# Altium PCB temperature_logger_pcb_v2.PcbDoc
Units mm, origin at the board's own origin, x right, y up, seen from the top; angles counter-clockwise.
Board outline 26.5 x 36 mm, 2 copper layers (Top Layer, Bottom Layer); 41 components, 32 nets, 188 pads, 42 vias.
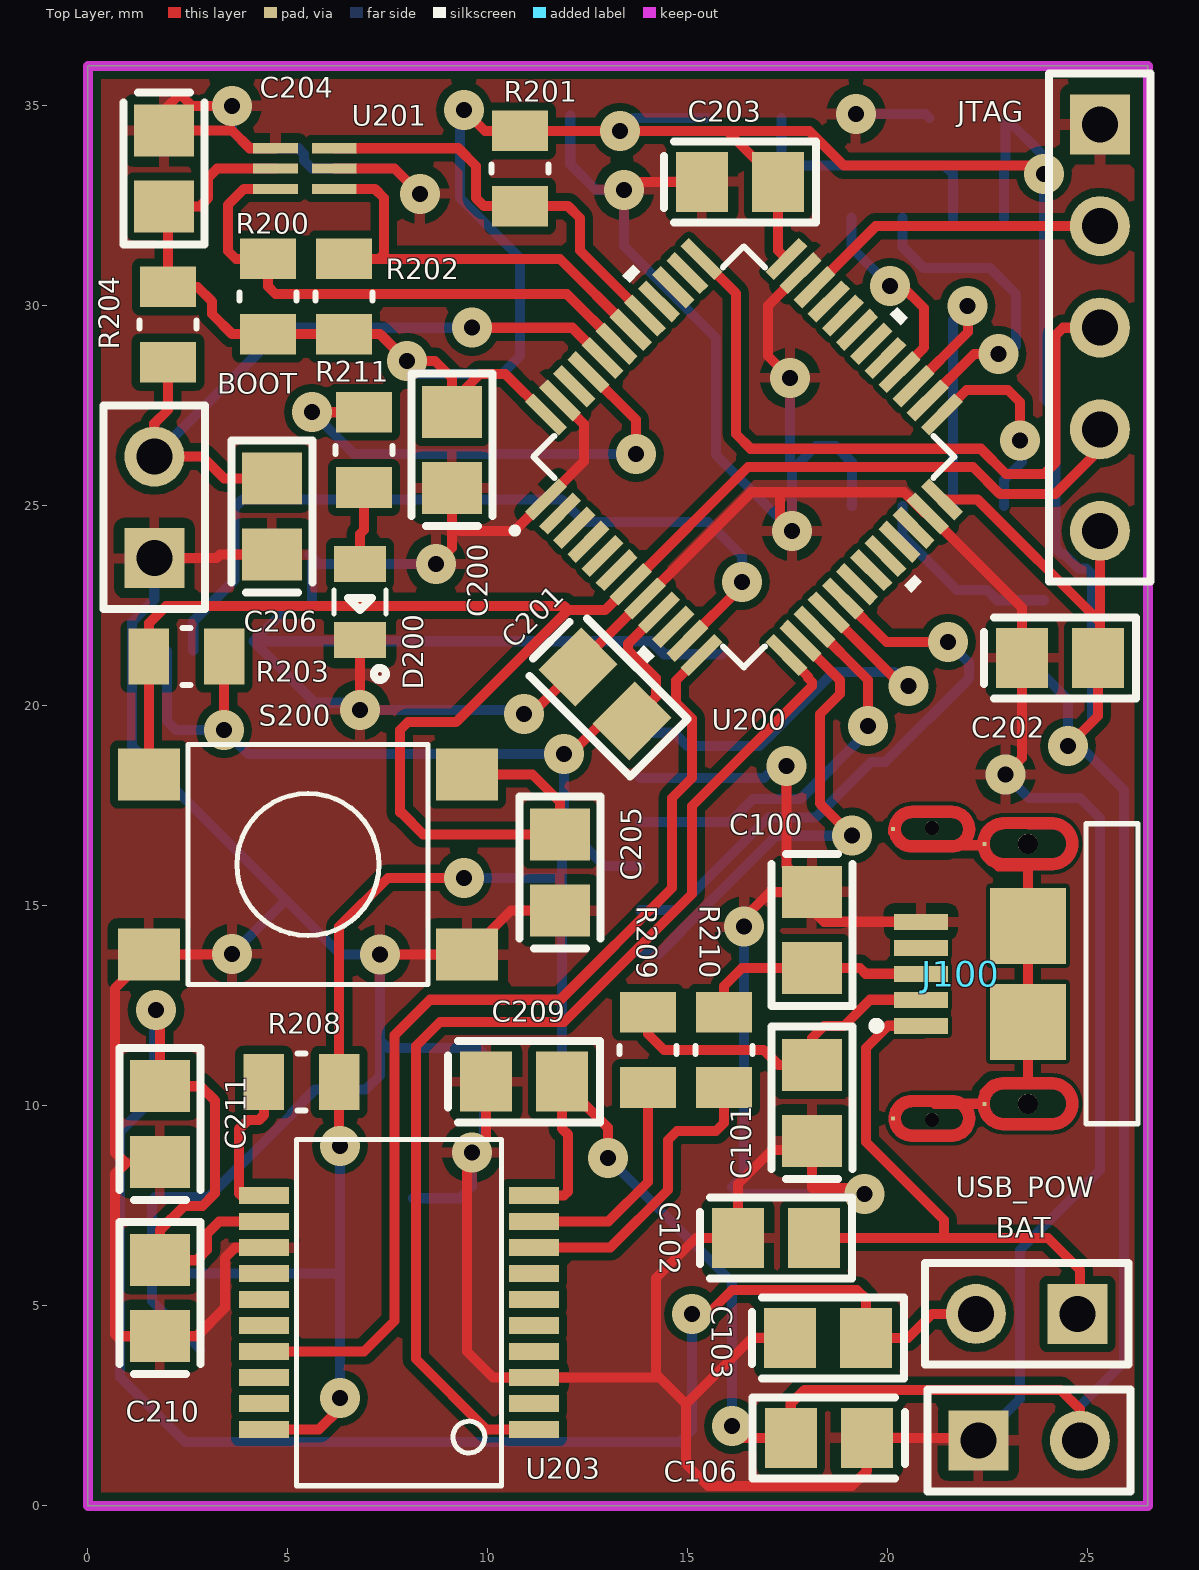
[diagram p0: Top Layer view]
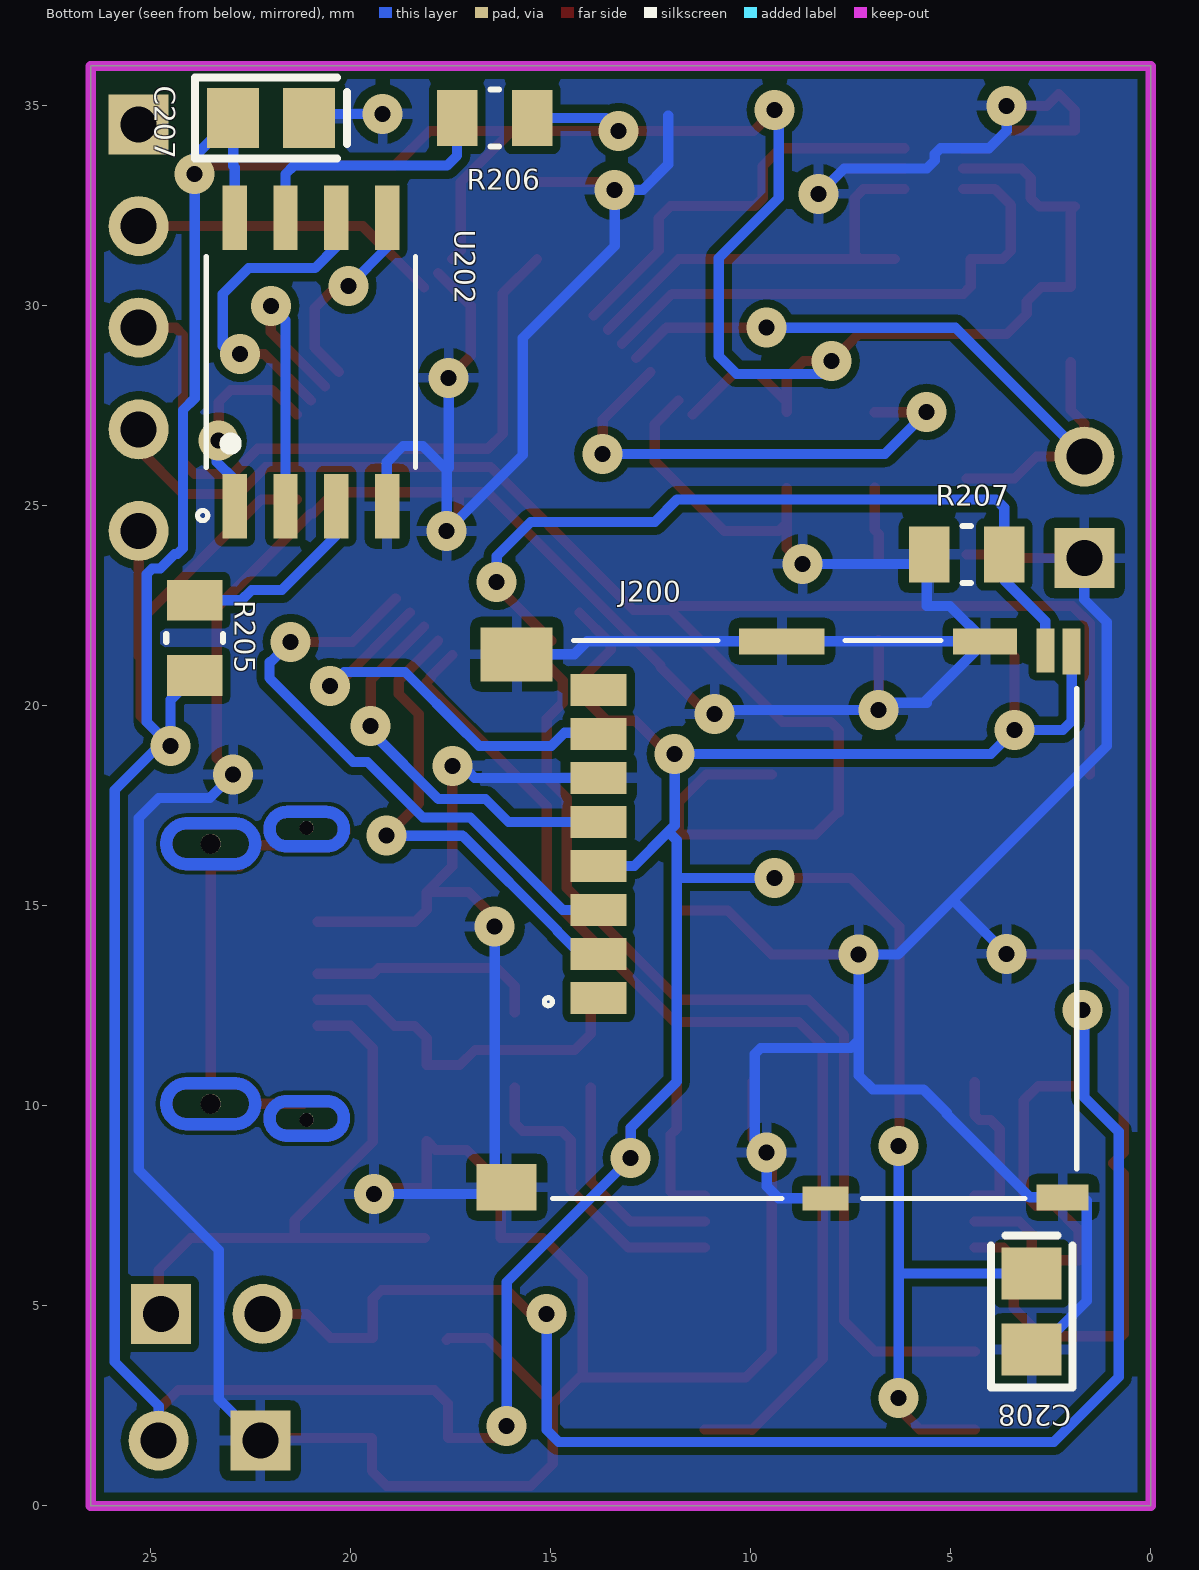
[diagram p1: Bottom Layer view, seen from below]

## Layer stack, top to bottom
Top Solder: solder mask 0.0102, Solder Resist, Dk 3.5
Top Layer: signal copper 0.0356
Dielectric 1: dielectric 0.32, FR-4, Dk 4.8
Bottom Layer: signal copper 0.0356
Bottom Solder: solder mask 0.0102, Solder Resist, Dk 3.5

## Board outline
0,0 0,36 26.5,36 26.5,0

## Design rules (kind name [scope] priority, off if disabled: settings)
Clearance STM32F4 [InComponent('U200')] p1: gap=0.152 ignorepadtopadclearanceinfootprint=FALSE
Clearance USB_PORT [InComponent('J100')] p2: gap=0.102 ignorepadtopadclearanceinfootprint=FALSE
Clearance [All] p3: gap=0.203 ignorepadtopadclearanceinfootprint=FALSE
PolygonConnect [All] p1: connectstyle=Relief reliefconductorwidth=0.254 reliefentries=4 polygonreliefangle="90 Angle" airgapwidth=0.254
RoutingVias [All] p1: holewidth=0.4 width=1 viastyle="Through Hole" minholewidth=0.3 minwidth=1 maxholewidth=0.711 maxwidth=1
SolderMaskExpansion [All] p1: expansion=0.102
Width [All] p1: maxlimit=0.381 minlimit=0.152 preferedwidth=0.254
30 further rules are at their usual default settings.

## Classes and differential pairs
component class 01_Power: BAT C100 C101 C102 C103 C106 J100 USB_POW
component class 02_MCU: BOOT C200 C201 C202 C203 C204 C205 C206 C207 C208 C209 C210 C211 D200 J200 JTAG R200 R201 R202 R203 R204 R205 R206 R207 R208 R209 R210 R211 S200 U200 U201 U202 U203

## Components (designator, comment, footprint, x,y, rotation, side; value= is the part's Value field where it differs from the comment)
BAT "" HDR1X2 22.26,1.635 r0 top
BOOT "" HDR1X2 1.66,23.695 r90 top
C100 "47 pF" C0805 18.1,14.4 r270 top
C101 "47 pF" C0805 18.1,10.077 r90 top
C102 "10 nF" C0805 17.2,6.7 r0 top
C103 "100 nF" C0805 18.5,4.2 r0 top
C106 "10 nF" C0805 18.521,1.7 r180 top
C200 "1000 pF" C0805 9.1,26.4 r90 top
C201 "1000 pF" C0805 12.929,20.3 r315 top
C202 "1000 pF" C0805 24.3,21.2 r0 top
C203 "1000 pF" C0805 16.3,33.1 r0 top
C204 "1000 pF" C0805 1.9,33.435 r270 top
C205 "1000 pF" C0805 11.8,15.835 r90 top
C206 "1000 pF" C0805 4.6,24.735 r90 top
C207 "1000 pF" C0805 21.988,34.7 r0 bottom
C208 "1000 pF" C0805 2.975,4.86 r270 bottom
C209 "100 nF" C0805 10.9,10.607 r0 top
C210 "1000 pF" C0805 1.8,5.193 r90 top
C211 "47 pF" C0805 1.8,9.543 r90 top
D200 "LGR971" D0805 6.8,22.6 r270 top value="Green LED"
J100 "USB_Micro_B" MicroUSB 23.5,13.304 r90 top value="USB Micro B"
J200 "MicroSD" MicroSD 9.05,14.665 r270 bottom
JTAG "" HDR1X5 25.3,34.535 r270 top
R200 "5 k" R0805 4.5,30.235 r90 top value=5k
R201 "5 k" R0805 10.8,33.435 r270 top value=5k
R202 "5 k" R0805 6.4,30.235 r90 top value=5k
R203 "1 k" R0805 2.465,21.235 r180 top value=1k
R204 "1 k" R0805 2,29.535 r270 top value=1k
R205 "1 k" R0805 23.9,21.7 r90 bottom value=1k
R206 "1 k" R0805 16.4,34.7 r0 bottom value=1k
R207 "10 k" R0805 4.6,23.785 r0 bottom value=10k
R208 "1 k" R0805 5.34,10.6 r180 top value=1k
R209 "27" R0805 14,11.4 r90 top
R210 "27" R0805 15.9,11.4 r90 top
R211 "1 k" R0805 6.9,26.4 r90 top value=1k
S200 "Switch_tactile" Tactile1 5.5,16.035 r180 top value=Switch_Tactile
U200 "STM32L053" LQFP48-7x7mm 16.4,26.224 r45 top locked value=STM32L053C8T6
U201 "TMP112" SOT563 5.425,33.435 r180 top value=TMP112AIDRLT
U202 "16MB_FLASH" 8-SOIC 20.996,28.6 r90 bottom value=MX25R1635FM2IH1
U203 "FT231XS-R" SSOP20 7.775,4.835 r90 top
USB_POW "" HDR1X2 24.74,4.8 r180 top

## Footprints (in the part's own frame and the unit in brackets; to place one, negate y for a bottom-side part, rotate by r counter-clockwise, add the part's x,y. Pads: shape width x height; smd on the part's side, far side on the other; paste and mask are expansions set on the pad)
8-SOIC [mm]
  rect 1.61x0.61 smd: 1(-3.605,1.905) 2(-3.605,0.635) 3(-3.605,-0.635) 4(-3.605,-1.905) 5(3.605,-1.905) 6(3.605,-0.635) 7(3.605,0.635) 8(3.605,1.905)
  silkscreen extent -3.97,-2.62 2.64,2.83
C0805 [mm] "Chip Capacitor; Body 2.0 x 1.2 mm (LxW typ)"
  rect 1.3x1.5 smd: 1(-0.95,0) 2(0.95,0)
  silkscreen extent -1.9,-1.02 1.91,1.02
D0805 [mm]
  rect 0.9x1.3 smd: A(-0.95,0) C(0.95,0)
  silkscreen extent -0.3,-0.65 1.95,0.65
HDR1X2 [mm] "Connector; Header; 2 Position"
  rect 1.5x1.5 hole 0.9: 1(0,0)
  round 1.5 hole 0.9: 2(2.54,0)
  silkscreen extent -1.27,-1.27 3.81,1.27
HDR1X5 [mm] "Connector; Header; 5 Position"
  rect 1.5x1.5 hole 0.9: 1(0,0)
  round 1.5 hole 0.9: 2(2.54,0) 3(5.08,0) 4(7.62,0) 5(10.16,0)
  silkscreen extent -1.27,-1.27 11.43,1.27
LQFP48-7x7mm [mm]
  rect 1.194x0.305 smd: 1(-4.25,2.75) 2(-4.25,2.25) 3(-4.25,1.75) 4(-4.25,1.25) 5(-4.25,0.75) 6(-4.25,0.25) 7(-4.25,-0.25) 8(-4.25,-0.75) 9(-4.25,-1.25) 10(-4.25,-1.75) 11(-4.25,-2.25) 12(-4.25,-2.75) 25(4.25,-2.75) 26(4.25,-2.25) 27(4.25,-1.75) 28(4.25,-1.25) 29(4.25,-0.75) 30(4.25,-0.25) 31(4.25,0.25) 32(4.25,0.75) 33(4.25,1.25) 34(4.25,1.75) 35(4.25,2.25) 36(4.25,2.75)
  rect 0.305x1.194 smd: 13(-2.75,-4.25) 14(-2.25,-4.25) 15(-1.75,-4.25) 16(-1.25,-4.25) 17(-0.75,-4.25) 18(-0.25,-4.25) 19(0.25,-4.25) 20(0.75,-4.25) 21(1.25,-4.25) 22(1.75,-4.25) 23(2.25,-4.25) 24(2.75,-4.25) 37(2.75,4.25) 38(2.25,4.25) 39(1.75,4.25) 40(1.25,4.25) 41(0.75,4.25) 42(0.25,4.25) 43(-0.25,4.25) 44(-0.75,4.25) 45(-1.25,4.25) 46(-1.75,4.25) 47(-2.25,4.25) 48(-2.75,4.25)
  silkscreen extent -5.43,-5.35 5.35,5.35, body extent 0,0 0.25,0.25, height 0.25
MicroSD [mm]
  rect 0.8x1.4 smd: 1(1.965,-4.75) 2(0.865,-4.75) 3(-0.235,-4.75) 4(-1.335,-4.75) 5(-2.435,-4.75) 6(-3.535,-4.75) 7(-4.635,-4.75) 8(-5.735,-4.75)
  rect 1.15x0.45 smd: 9(-6.7,7.075)
  rect 1.1x0.45 smd: 10(-6.725,6.415)
  rect 1.35x1.8 smd: 11(-6.625,-6.8)
  rect 0.65x2.14 smd: 12(-6.95,-0.17)
  rect 0.65x1.6 smd: 13(-6.95,4.91)
  rect 0.65x1.3 smd: 14(6.95,6.85)
  rect 0.6x1.15 smd: 15(6.975,0.925)
  rect 1.16x1.5 smd: 16(6.695,-7.05)
  silkscreen extent -6.98,-6.11 6.98,7.2
MicroUSB [mm]
  rect 0.4x1.35 smd: 1(-1.3,2.675) 2(-0.65,2.675) 3(0,2.675) 4(0.65,2.675) 5(1.3,2.675)
  round 0.35 hole 0.35 unplated: None(-3.65,2.4) None(3.65,2.4)
  round 0.5 hole 0.5 unplated: None(-3.25,0) None(3.25,0)
  rect 0.1x0.1 smd: S1(-3.25,1.08) S2(3.25,1.08) S3(-3.615,3.369) S6(3.615,3.369)
  rect 1.9x1.9 smd: S4(-1.2,0) S5(1.2,0)
  Top Layer region: 258 vertices and 0 holes, not listed, extent -3.91,-1.26 -2.59,1.26
  Top Layer region: 258 vertices and 0 holes, not listed, extent 2.59,-1.26 3.91,1.26
  Top Layer region: 258 vertices and 0 holes, not listed, extent -4.195,1.32 -3.035,3.48
  Top Layer region: 258 vertices and 0 holes, not listed, extent 3.035,1.32 4.195,3.48
  Bottom Layer region: 258 vertices and 0 holes, not listed, extent -3.91,-1.26 -2.59,1.26
  Bottom Layer region: 258 vertices and 0 holes, not listed, extent 2.59,-1.26 3.91,1.26
  Bottom Layer region: 258 vertices and 0 holes, not listed, extent -4.195,1.32 -3.035,3.48
  Bottom Layer region: 258 vertices and 0 holes, not listed, extent 3.035,1.32 4.195,3.48
  silkscreen extent -3.75,-2.75 3.75,3.89
R0805 [mil]
  rect 40x55 smd: 1(-37,0) 2(37,0)
  silkscreen extent -4,-28 4,28
SOT563 [mil]
  rect 44x10 smd: 1(-29,20) 2(-29,0) 3(-29,-20) 4(29,-20) 5(29,0) 6(29,20)
SSOP20 [mm]
  rect 0.42x1.25 smd: P$1(-2.925,-3.375) P$2(-2.275,-3.375) P$3(-1.625,-3.375) P$4(-0.975,-3.375) P$5(-0.325,-3.375) P$6(0.325,-3.375) P$7(0.975,-3.375) P$8(1.625,-3.375) P$9(2.275,-3.375) P$10(2.925,-3.375) P$11(2.925,3.375) P$12(2.275,3.375) P$13(1.625,3.375) P$14(0.975,3.375) P$15(0.325,3.375) P$16(-0.325,3.375) P$17(-0.975,3.375) P$18(-1.625,3.375) P$19(-2.275,3.375) P$20(-2.925,3.375)
  silkscreen extent -4.33,-2.56 4.33,2.56
Tactile1 [mm] "6 mm x 6 mm"
  rect 1.55x1.3 smd: 1(-3.975,2.25) 2(3.975,2.25) 3(-3.975,-2.25) 4(3.975,-2.25)
  silkscreen extent -3,-3 3,3

## Part data
BAT BOOT USB_POW: library part "Header 2", "Header, 2-Pin", LatestRevisionDate=17-Jul-2002, LatestRevisionNote="Re-released for DXP Platform.", Publisher="Altium Limited"
C100 C101 C211: library part Cap-47pF, "CAP CER 47PF 1KV C0G/NP0 0805", Manufacturer=KEMET, Manufacturer Part Number=C0805C470JDGACTU, Package=C0805, Digikey_link=https://www.digikey.com.au/product-detail/en/kemet/C0805C470JDGACTU/399-7157-1-ND/3439404, Price="0.62 AUD"
C102 C106: library part Cap-10nF, "CAP CER 10000PF 10V X7R 0805", Manufacturer="Wurth Electronics Inc.", Manufacturer Part Number=885012207011, Package=C0805, Digikey_link=https://www.digikey.com.au/product-detail/en/wurth-electronics-inc/885012207011/732-8021-1-ND/5454648, Price="0.15 AUD"
C103 C209: library part Cap-100nF, "CAP CER 0.1UF 50V X7R 0805", Manufacturer=KEMET, Manufacturer Part Number=C0805X104K5RACTU, Package=C0805, Digikey_link=https://www.digikey.com.au/product-detail/en/kemet/C0805X104K5RACTU/399-5330-1-ND/1842309, Price="0.46 AUD"
C200 C201 C202 C203 C204 C205 C206 C207 C208 C210: library part Cap-1000pF, "CAP CER 1000PF 100V X7R 0805", Manufacturer=KEMET, Manufacturer Part Number=C0805C102K1RACTU, Package=C0805, Digikey_link=https://www.digikey.com.au/product-detail/en/kemet/C0805C102K1RACTU/399-1148-2-ND/411147, Price="0.035 USD"
D200: "LED GREEN DIFFUSED 0805 SMD", Manufacturer="Osram Opto", Manufacturer Part Number="LG R971-KN-1", Package=LED0805, Digikey_link=https://www.digikey.com.au/product-detail/en/osram-opto-semiconductors-inc/LG-R971-KN-1/475-1410-2-ND/1227925, Price="0.09 USD"
J100: "USB - micro B USB 2.0 Receptacle Connector 5 Position Surface Mount, Right Angle; Through Hole", Manufacturer="TE Connectivity", Manufacturer Part Number=2040002-1, Package=USB-Micro-B, Digikey_link=https://www.digikey.com.au/product-detail/en/te-connectivity-amp-connectors/2040002-1/A108263CT-ND/4021990, Price="3.03 USD", Product_Type=Connector
J200: "MICRO SD PUSH PUSH LOW PROFILE TYPE", Manufacturer="TE Connectivity", Manufacturer Part Number=2201778-1, Digikey_link=https://www.digikey.com.au/product-detail/en/te-connectivity-amp-connectors/2201778-1/A118117CT-ND/4729820, Package=MicroSD, Price="3.61 USD", Product_Type="Removable Memory Products"
JTAG: library part "Header 5", "Header, 5-Pin", LatestRevisionDate=17-Jul-2002, LatestRevisionNote="Re-released for DXP Platform.", Publisher="Altium Limited"
R200 R201 R202: library part Res-5k, "RES SMD 4.7K OHM 0.1% 1/8W 0805", Manufacturer="Panasonic Electronic Components", Manufacturer Part Number=ERA-6AEB472V, Package=R0805, Digikey_link=https://www.digikey.com.au/product-detail/en/panasonic-electronic-components/ERA-6AEB472V/P4.7KDACT-ND/1465963, Price="0.51 AUD"
R203 R204 R205 R206 R208 R211: library part Res-1k, "RES 1K OHM 0.1% 1/5W 0805", Manufacturer="Vishay Dale", Manufacturer Part Number=TNPW08051K00BEEA, Package=R0805, Digikey_link=https://www.digikey.com.au/product-detail/en/vishay-dale/TNPW08051K00BEEA/TNP1.00KABTR-ND/1607282, Price="0.03 USD"
R207: library part Res-10k, "RES SMD 10K OHM 0.1% 1/8W 0805", Manufacturer="Panasonic Electronic Components", Manufacturer Part Number=ERA-6AEB103V, Package=R0805, Digikey_link=https://www.digikey.com/product-detail/en/panasonic-electronic-components/ERA-6AEB103V/P10KDACT-ND/1465971, Price="0.36 AUD"
R209 R210: library part Res-27, "RES SMD 27 OHM 5% 1/8W 0805", Manufacturer="Panasonic Electronic Components", Manufacturer Part Number=ERJ-6GEYJ270V, Package=R0805, Digikey_link=https://www.digikey.com.au/product-detail/en/panasonic-electronic-components/ERJ-6GEYJ270V/P27ACT-ND/42810, Price="0.11 AUD"
S200: "SWITCH TACTILE SPST-NO 0.05A 12V", Manufacturer="C&K Components", Manufacturer Part Number=PTS645SM43SMTR, Package=6x6, Digikey_link=https://www.digikey.com.au/product-detail/en/c-k/PTS645SM43SMTR92-LFS/CKN9112CT-ND/1146934, Price="0.22 USD"
U200: library part STM32L0x3CL4, "IC MCU 32BIT 64KB FLASH 48LQFP", Manufacturer=STMicroelectronics, Manufacturer Part Number=STM32L053C8T6, Package=48LQFP, Digikey_link=https://www.digikey.com.au/product-detail/en/stmicroelectronics/STM32L053C8T6/497-14906-ND/4935255, Price="5.66 AUD"
U201: library part TMP112AIDRLT, "1.4V-Capable ?0.5?C Temperature Sensor with Alert Function and I2C/SMBus interface in SOT-563 6-SOT -40 to 125", Manufacturer="Texas Instruments", Package=SOT-563, Digikey_link=https://www.digikey.com/product-detail/en/texas-instruments/TMP112AIDRLR/296-38578-2-ND/2232593, Manufacturer Part Number=TMP112AIDRLT, Price="1 USD"
U202: library part MX25R1635, "IC FLASH 16M SPI 80MHZ 8SOP", Manufacturer=Macronix, Manufacturer Part Number=MX25R1635FM2IL0, Package=SOP-8, Digikey_link=https://www.digikey.com/product-detail/en/macronix/MX25R1635FM2IH1/1092-1176-ND/5957737, Price="0.97 USD"
U203: "USB Full Speed to Full Handshake UART with USB Charger Detection", Package="SSOP-20 FTDI", Availability=Good, MF=FTDI,, MP=FT231XS-R, Price="1.80 USD", SnapEDA_Link=https://www.snapeda.com/parts/FT231XS-R/FTDI%2C%20Future%20Technology%20Devices%20International%20Ltd/view-part/?ref=snap

## Via types
v1: diameter 1, hole 0.4, Top Layer to Bottom Layer, 42 vias

## Nets (pads, with @x,y where several pads share a name; then routed paths per layer and width w, separated by ;. In a path a pad name is that pad's centre, name@x,y a point inside that pad or via, vN(x,y) a via of type N, cw(c..) or ccw(c..) an arc to the next point about the centre after c; other vN are vias at no path point)
3V: BAT.2 C106.2 C200.2 C201.2 C202.2 C203.2 C204.2 C207.2 C208.1 C209.2 J200.4 J200.9 JTAG.5 R200.1 R201.1 R202.1 R203.1 R204.1 R205.1 R206.1 R208.1 U200.9 U200.24 U200.36 U200.48 U201.5 U202.8 U203.P$10 U203.P$20 | length 181.1
  Top Layer w0.254: v1(3.4,19.4) 3.405,19.405 R203.1 ; U203.P$20 5.774,1.91 6.279,2.415 6.279,2.679 v1(6.3,2.7) ; U201.5 3.235,33.435 3,33.2 3,32.695 2.79,32.485 C204.2 2,32.385 R204.1 2.738,30.475 3.1,30.113 3.1,29.8 3.605,29.295 R200.1 R202.1 7.304,29.295 v1(7.975,28.625) 8.675,28.625 9.1,28.2 C200.2@9.1,27.6 ; v1(6.3,9) 6.279,9.021 R208.1 6.279,14.479 7.5,15.7 v1(9.4,15.7) ; C200.2 C200.2@9.1,27.6 ; v1(9.4,34.9) 9.925,34.375 R201.1 v1(13.3,34.375) 15.975,34.375 ; U203.P$10 11.9,7.76 12.005,7.865 12.005,9.278 11.85,9.433 C209.2 13,9.457 v1(13,8.7) ; U200.48 10.435,28.3 9.8,28.3 C200.2@9.1,27.6 ; v1(11.9,18.8) 12.06,18.8 12.888,19.628 C201.2 14.2,20.227 14.2,20.7 13.5,21.4 13.5,21.556 U200.9 ; v1(16.1,2) 16.4,1.7 C106.2 17.571,2.559 17.912,2.9 24.315,2.9 24.8,2.415 BAT.2 ; U200.36 17.25,31.384 C203.2 15.975,34.375 ; U200.24 22.237,25.163 25.3,22.1 ; v1(23.9,33.3) 23.8,33.3 23.593,33.507 18.9,33.507 18.032,34.375 15.975,34.375 ; v1(24.502,19) 25.25,19.748 C202.2 25.3,21.25 25.3,22.1 ; JTAG.5 25.3,22.1
  Bottom Layer w0.254: J200.9 1.975,19.625 2.2,19.4 v1(3.4,19.4) 4,18.8 v1(11.9,18.8) 11.9,17.013 12.06,16.853 ; C208.1@2.425,5.81 C208.1 6.29,5.81 6.3,5.8 ; v1(6.3,2.7) 6.3,5.8 ; v1(6.3,9) 6.3,5.8 ; v1@7.975,28.3 10.35,28.3 10.8,28.75 10.8,31.2 9.3,32.7 9.3,34.8 9.34,34.76 9.4,34.82 v1(9.4,34.9) ; v1(9.4,15.7) 11.85,15.7 ; v1(13.3,34.375) 13.625,34.7 R206.1 ; J200.4 12.913,16 12.06,16.853 ; v1(16.1,2) 16.1,5.6 v1(13,8.7) 13,9.457 11.85,10.607 11.85,15.7 ; U202.8 22.901,33.463 22.938,33.5 C207.2 23.9,33.738 v1(23.9,33.3) 23.9,27.693 24.193,27.4 24.193,23.941 24.334,23.8 24.4,23.8 24.763,23.437 24.963,23.437 25.1,23.3 25.1,19.598 v1(24.502,19) ; R205.1 24.502,20.158 v1(24.502,19) ; BAT.2 24.8,2.5 25.9,3.6 25.9,17.9 24.9,18.9 24.602,18.9 v1(24.502,19) ; 11.85,15.7 11.85,16.643 12.06,16.853
5V: C103.2 C210.2 C211.2 U203.P$12 USB_POW.2 | length 47.8
  Top Layer w0.254: v1(1.7,12.4) 1.8,12.3 C211.2 2.806,10.493 2.813,10.5 3.175,10.138 3.175,7.81 2.865,7.5 2.405,7.5 1.8,6.895 C210.2 2.718,6.143 2.975,6.4 2.975,6.8 3.285,7.11 U203.P$12 ; v1(15.1,4.8) 15.5,4.8 16.1,5.4 19.228,5.4 19.45,5.178 C103.2 20.5,4.2 21.1,4.8 USB_POW.2
  Bottom Layer w0.254: v1(1.7,12.4) 1.66,12.36 1.66,10.217 0.8,9.357 0.8,3.225 2.425,1.6 14.8,1.6 15.1,1.9 v1(15.1,4.8)
ALERT: R201.2 U200.41 U201.3 | length 10.4
  Top Layer w0.254: U201.3 9.257,33.943 9.7,33.5 9.7,32.695 9.9,32.495 R201.2 12.005,32.495 12.3,32.2 12.3,31.385 U200.41
BOOT0: BOOT.2 C206.2 R204.2 U200.44 | length 18.5
  Top Layer w0.254: R204.2 2,27.4 1.66,27.06 BOOT.2 2.855,26.235 3.405,25.685 C206.2 ; v1(9.6,29.455) 12.108,29.455 U200.44
  Bottom Layer w0.254: BOOT.2 4.88,29.455 v1(9.6,29.455)
CARD_DETECT: J200.10 R207.1 U200.11 | length 20
  Top Layer w0.254: U200.11 16.35,22.992 v1(16.35,23.1)
  Bottom Layer w0.254: J200.10 2.635,22.119 3.66,23.144 R207.1 3.66,24.954 3.869,25.163 11.837,25.163 12.4,24.6 15.5,24.6 16.35,23.75 v1(16.35,23.1)
FLASH_CSN: U200.25 U202.1 | length 5.2
  Top Layer w0.254: U200.25 21.965,27.9 23,27.9 23.3,27.6 v1(23.3,26.635)
  Bottom Layer w0.254: U202.1 22.901,25.651 23.35,26.1 23.35,26.585 v1(23.3,26.635) v1@23.35,26.635
FLASH_MISO: U200.27 U202.2 | length 7.8
  Top Layer w0.254: U200.27 22,29.349 22,29.988 v1(21.988,30)
  Bottom Layer w0.254: U202.2 21.631,29.643 v1(21.988,30) v1@22.01,29.978
FLASH_MOSI: U200.28 U202.5 | length 5
  Top Layer w0.254: v1(20.053,30.5) 20.349,30.5 20.9,29.949 20.9,28.956 U200.28
  Bottom Layer w0.254: U202.5 19.091,31.462 v1(20.053,30.5)
FLASH_SCLK: U200.26 U202.6 | length 8.1
  Top Layer w0.254: U200.26 22.158,28.8 v1(22.763,28.8)
  Bottom Layer w0.254: U202.6 20.361,31.477 20.894,30.944 22.556,30.944 23.2,30.3 23.2,29 23,28.8 v1(22.763,28.8)
FT_RX: U200.13 U203.P$1 | length 27.5
  Top Layer w0.254: U203.P$1 9.985,1.91 9.975,1.9 8.2,3.675 8.2,11.5 8.8,12.1 11.9,12.1 15.1,15.3 15.1,17.5 18.1,20.5 18.1,20.6 18,20.7 18,20.735 U200.13
FT_TX: U200.12 U203.P$17 | length 25.6
  Top Layer w0.254: U203.P$17 6.9,3.86 7.665,4.625 7.665,11.765 8.554,12.654 11.807,12.654 14.6,15.447 14.6,17.7 15.1,18.2 15.1,19.68 14.7,20.08 14.7,20.635 U200.12
GND: BAT.1 BOOT.1 C100.1 C101.1 C102.1 C103.1 C106.1 C200.1 C201.1 C202.1 C203.1 C204.1 C205.1 C206.1 C207.1 C208.2 C209.1 C210.1 C211.1 D200.C J100.5 J200.6 J200.11 J200.12 J200.13 J200.14 J200.15 J200.16 JTAG.1 R207.2 S200.1 S200.2 U200.1 U200.8 U200.23 U200.35 U200.47 U201.2 U201.4 U202.4 U203.P$3 U203.P$13 | length 240.4
  Top Layer w0.254: BOOT.1 3.21,23.695 3.3,23.785 C206.1 ; v1(3.6,13.8) 3.585,13.785 S200.2 0.675,12.935 0.675,8.835 0.943,8.568 0.675,8.3 0.675,4.3 0.732,4.243 C210.1 2.718,4.243 3.425,4.95 3.425,6.2 3.685,6.46 U203.P$13 ; v1(3.6,35) 2.6,35 2.3,35.3 1.9,34.9 C204.1 3.6,34.385 4.042,33.943 U201.4 ; U201.2 7.665,33.435 v1(8.3,32.8) ; v1(6.8,19.9) D200.C ; v1(7.3,13.785) S200.1 10.575,14.885 C205.1 ; v1(8.7,23.55) 9.1,23.95 9.1,24.575 ; C200.1 9.1,24.575 ; C209.1 9.95,9.185 v1(9.6,8.835) 9.475,8.71 9.475,3.86 10.125,3.21 U203.P$3 14.29,3.21 ; v1(10.9,19.8) 11.086,19.8 C201.1 12.258,21.021 16.579,25.343 17.3,25.343 ; U200.47 12.4,27.042 12.4,26.113 U200.1 10.662,24.375 9.3,24.375 9.1,24.575 ; v1(13.4,32.9) 13.6,33.1 C203.1 ; v1(16.4,14.479) 16.4,14.7 17.05,15.35 C100.1 ; v1(17.461,18.5) 17.461,15.989 C100.1 ; v1(17.55,28.2) 17,28.75 17,30.006 U200.35 ; C103.1@17.6,4.15 C103.1 16.6,4.2 14.95,2.55 ; v1(17.6,24.375) 17.3,24.675 17.3,25.343 ; v1(19.417,7.798) 19.268,7.947 18.1,7.947 C101.1 17.873,8.9 17.1,8.9 16.25,8.05 C102.1 15.2,6.7 14.2,5.7 14.2,3.3 14.29,3.21 ; J100.5 18.404,14.604 18.4,14.6 18.1,14.9 C100.1 ; BAT.1 22.195,1.7 C106.1 19.471,0.871 19.1,0.5 15.5,0.5 14.95,1.05 14.95,2.55 ; v1(22.938,18.285) 23.35,18.697 C202.1 23.35,22.456 U200.23 20.937,24.81 20.404,25.343 17.3,25.343 ; 14.29,3.21 14.95,2.55
  Bottom Layer w0.254: BOOT.1 1.66,22.66 1.1,22.1 1.1,19 4.9,15.2 ; C208.2@2.813,3.91 1.6,5.123 1.6,7.63 1.685,7.715 J200.14 3.016,7.715 5.1,9.799 5.1,9.829 5.685,10.414 6.951,10.414 7.3,10.762 7.3,11.65 ; v1(3.6,13.8) 4.9,15.1 4.9,15.2 ; v1(3.6,35) 3.6,34.385 4.042,33.943 5.257,33.943 5.4,33.8 5.4,33.635 5.6,33.435 7.665,33.435 v1(8.3,32.8) ; R207.2 R207.2@5.6,23.725 ; J200.15 9.3,7.69 9.6,7.99 v1(9.6,8.835) 9.9,9.135 9.9,11.3 9.75,11.45 7.5,11.45 7.3,11.65 ; v1(8.7,23.55) 5.775,23.55 R207.2@5.6,23.725 ; v1(10.9,19.8) 10.8,19.9 v1(6.8,19.9) 6.62,20.08 5.6,20.08 5.6,20.155 J200.13 ; 12.06,34.76 12.06,33.54 12.7,32.9 v1(13.4,32.9) 13.4,31.5 15.7,29.2 15.7,26.275 v1(17.6,24.375) 17.6,25.9 ; J200.6 16.9,18.2 17.2,18.5 v1@17.326,18.5 ; J200.11 14.41,21.29 14.085,21.615 J200.12 J200.13 ; v1(16.4,14.479) 16.4,8.27 J200.16 16.272,7.798 v1(19.417,7.798) ; v1(17.55,28.2) 17.55,25.95 17.6,25.9 ; U202.4 19.098,25.002 19.098,26.093 18.691,26.5 18.2,26.5 17.6,25.9 ; v1@19.2,34.9 v1(19.2,34.8) 20.938,34.8 C207.1 ; BAT.1 23.3,2.675 23.3,6.4 25.3,8.4 25.3,17.2 24.8,17.7 23.523,17.7 v1(22.938,18.285) ; J200.13 5.025,22.5 5.6,22.5 R207.2@5.6,23.725 ; 4.9,15.2 6.315,13.785 v1(7.3,13.785) 7.3,11.65
I2C_SCL: R202.2 U200.42 U201.1 | length 10.8
  Top Layer w0.254: U201.1 7.173,32.927 7.4,32.7 7.4,31.3 7.275,31.175 ; R202.2 7.275,31.175 ; U200.42 11.803,31.175 7.275,31.175
I2C_SDA: R200.2 U200.43 U201.6 | length 13.6
  Top Layer w0.254: U201.6 3.9,32.927 3.5,32.527 3.5,31.374 3.7,31.174 3.701,31.175 R200.2 4.5,30.488 4.688,30.3 11.971,30.3 U200.43
MICROSD_CLK: J200.5 U200.15 | length 9.8
  Top Layer w0.254: U200.15 19.5,20.649 v1(19.5,19.5)
  Bottom Layer w0.254: J200.5 16.057,17.1 16.629,17.672 17.115,17.672 17.117,17.67 17.805,17.67 19.5,19.365 v1(19.5,19.5)
MICROSD_CS: J200.2 U200.14 | length 12.4
  Top Layer w0.254: U200.14 18.8,20.642 18.8,20.3 18.3,19.8 18.3,17.558 v1(19.1,16.758)
  Bottom Layer w0.254: J200.2 14.267,13.8 14.83,14.363 14.83,14.384 17.202,16.755 19.098,16.755 v1(19.1,16.758)
MICROSD_DI: J200.3 U200.17 | length 14.9
  Top Layer w0.254: U200.17 19.963,21.6 v1(21.5,21.6)
  Bottom Layer w0.254: J200.3 14.7,14.9 17.013,17.213 18.193,17.213 19.58,18.6 19.936,18.6 22.031,20.695 22.031,21.1 22,21.1 v1(21.5,21.6)
MICROSD_DO: J200.7 U200.16 | length 10.5
  Top Layer w0.254: U200.16 20.356,20.5 v1(20.513,20.5)
  Bottom Layer w0.254: J200.7 13.83,19.33 14.654,19.33 14.984,19 16.787,19 17.117,19.33 17.124,19.33 18.643,20.849 20.164,20.849 v1(20.513,20.5)
NetC102_2: C102.2 J100.1 USB_POW.1 | length 15.3
  Top Layer w0.254: C102.2 21.4,6.7 ; J100.1 20.004,12.004 19.45,11.45 19.45,9.1 21.4,7.15 21.4,6.7 ; USB_POW.1 24.8,4.86 24.8,5.9 24,6.7 21.4,6.7
NetD200_A: D200.A R211.1 | length 2
  Top Layer w0.254: D200.A 6.8,24.3 6.9,24.4 R211.1
NetR205_2: R205.2 U202.3 | length 4.9
  Bottom Layer w0.254: U202.3 20.361,24.259 21.721,22.9 22.476,22.9 22.737,22.64 R205.2
NetR206_2: R206.2 U202.7 | length 6.5
  Bottom Layer w0.254: R206.2 17.34,33.76 17.593,33.507 21.424,33.507 21.631,33.3 U202.7
NetR208_2: R208.2 U203.P$11 | length 3.9
  Top Layer w0.254: U203.P$11 3.825,7.76 3.775,7.81 3.775,9.418 4.001,9.645 4.275,9.645 4.4,9.77 R208.2
NetR209_1: R209.1 U203.P$9 | length 5.6
  Top Layer w0.254: U203.P$9 13.01,7.11 14,8.1 R209.1
NetR210_1: R210.1 U203.P$8 | length 7.7
  Top Layer w0.254: U203.P$8 13.06,6.46 14.5,7.9 14.5,9.148 14.725,9.373 15.7,9.373 15.9,9.573 R210.1
NRST: C205.2 JTAG.4 R203.2 S200.3 S200.4 U200.7 | length 45.7
  Top Layer w0.254: S200.4 R203.2 1.525,22.065 1.96,22.5 11.905,22.5 12.005,22.4 ; S200.3 11.115,18.285 11.8,17.6 C205.2 8.385,16.785 7.831,17.339 7.8,17.339 7.8,19.4 8,19.6 9.205,19.6 12.005,22.4 ; JTAG.4 25.3,26.414 24.186,25.3 22.798,25.3 22.125,25.973 16.502,25.973 U200.7 12.929,22.4 12.005,22.4
SHIELD_GND: J100.S1 J100.S2 J100.S3 J100.S4 J100.S5 J100.S6 | length 12.1
  Top Layer w0.254: J100.S6 20.131,16.834 20.486,16.479 21.463,16.479 21.5,16.516 22.382,16.516 J100.S2 22.42,16.342 22.772,15.991 23.5,15.991 J100.S5 J100.S4 23.5,10.564 23.473,10.537 22.624,10.537 22.42,10.333 J100.S1 21.181,10.054
SWCLK: JTAG.3 U200.37 | length 17.6
  Top Layer w0.254: U200.37 16.2,30.313 16.2,26.8 16.57,26.43 22.323,26.43 22.953,25.8 23.9,25.8 24.193,26.093 24.193,29.273 24.375,29.455 JTAG.3
SWDIO: JTAG.2 U200.34 | length 7.8
  Top Layer w0.254: U200.34 19.696,31.995 JTAG.2
USB_DM: C101.2 J100.2 R209.2 | length 8.8
  Top Layer w0.254: R209.2 14,11.8 14.4,11.4 16.893,11.4 17.266,11.027 C101.2 18.1,11.7 18.4,12 18.9,12 19.554,12.654 J100.2
USB_DP: C100.2 J100.3 R210.2 | length 5.8
  Top Layer w0.254: R210.2 15.9,13 16.35,13.45 C100.2 19.3,13.45 19.446,13.304 J100.3
USER_LED: R211.2 U200.45 | length 12.4
  Top Layer w0.254: v1(5.6,27.35) 5.61,27.34 R211.2 ; U200.45 13.7,27.156 v1(13.7,26.3)
  Bottom Layer w0.254: v1(5.6,27.35) 6.65,26.3 v1(13.7,26.3)
pads on no net: J100.4 J100.None J200.1 J200.8 U200.2 U200.3 U200.4 U200.5 U200.6 U200.10 U200.18 U200.19 U200.20 U200.21 U200.22 U200.29 U200.30 U200.31 U200.32 U200.33 U200.38 U200.39 U200.40 U200.46 U203.P$2 U203.P$4 U203.P$5 U203.P$6 U203.P$7 U203.P$14 U203.P$15 U203.P$16 U203.P$18 U203.P$19

## Polygon pours and split planes (outlines as drawn)
GND on Top Layer "Top Overlay-No Net" (solid, pour order 0): 0,35.9 0.1,36 26.5,36 26.5,0 0,0
GND on Bottom Layer "Top Overlay-No Net" (solid, pour order 2): 0,36 26.5,36 26.5,0 0,0

## Keep-outs
Keep-Out Layer:
  the board outline again, w0.254

## Silkscreen, mask and mechanical layers (free items; w line width, h text height)
Mechanical 1:
  lines w0.254: -1.908,1.524 -1.4,0 ; -1.908,34.476 -1.4,36 ; -1.654,0 -1.146,0 ; -1.654,36 -1.146,36 ; -1.4,12.896 -1.4,0 ; -1.4,23.104 -1.4,36 ; -0.892,1.524 -1.4,0 ; -0.892,34.476 -1.4,36 ; 0,36.946 0,37.454 ; 1.524,36.692 0,37.2 ; 1.524,37.708 0,37.2 ; 6.75,37.2 0,37.2 ; 19.75,37.2 26.5,37.2 ; 24.976,36.692 26.5,37.2 ; 24.976,37.708 26.5,37.2 ; 26.5,36.946 26.5,37.454
  text "26.5 (mm)" at 7.004,36.286 h1.52
  text "36 (mm)" at -0.486,13.15 h1.52 r90

## Text inside footprints (layer, text, board x,y; h text height)
J100: Mechanical 1 "PCB EDGE" at 28.961,6.827 h1.88 r90